# Altium PCB UL-SWAP-DAQ-2.PcbDoc (part 2 of 2)
Units mil, origin at the board's own origin, x right, y up, seen from the top; angles counter-clockwise.
Board outline 3000 x 3000 mil, 4 copper layers (Top Layer, GND, PWR, Bottom Layer), stack 23.756 mil thick; 123 components, 110 nets, 387 pads, 5 vias.
Unrouted connection lines stored in the file: 181.
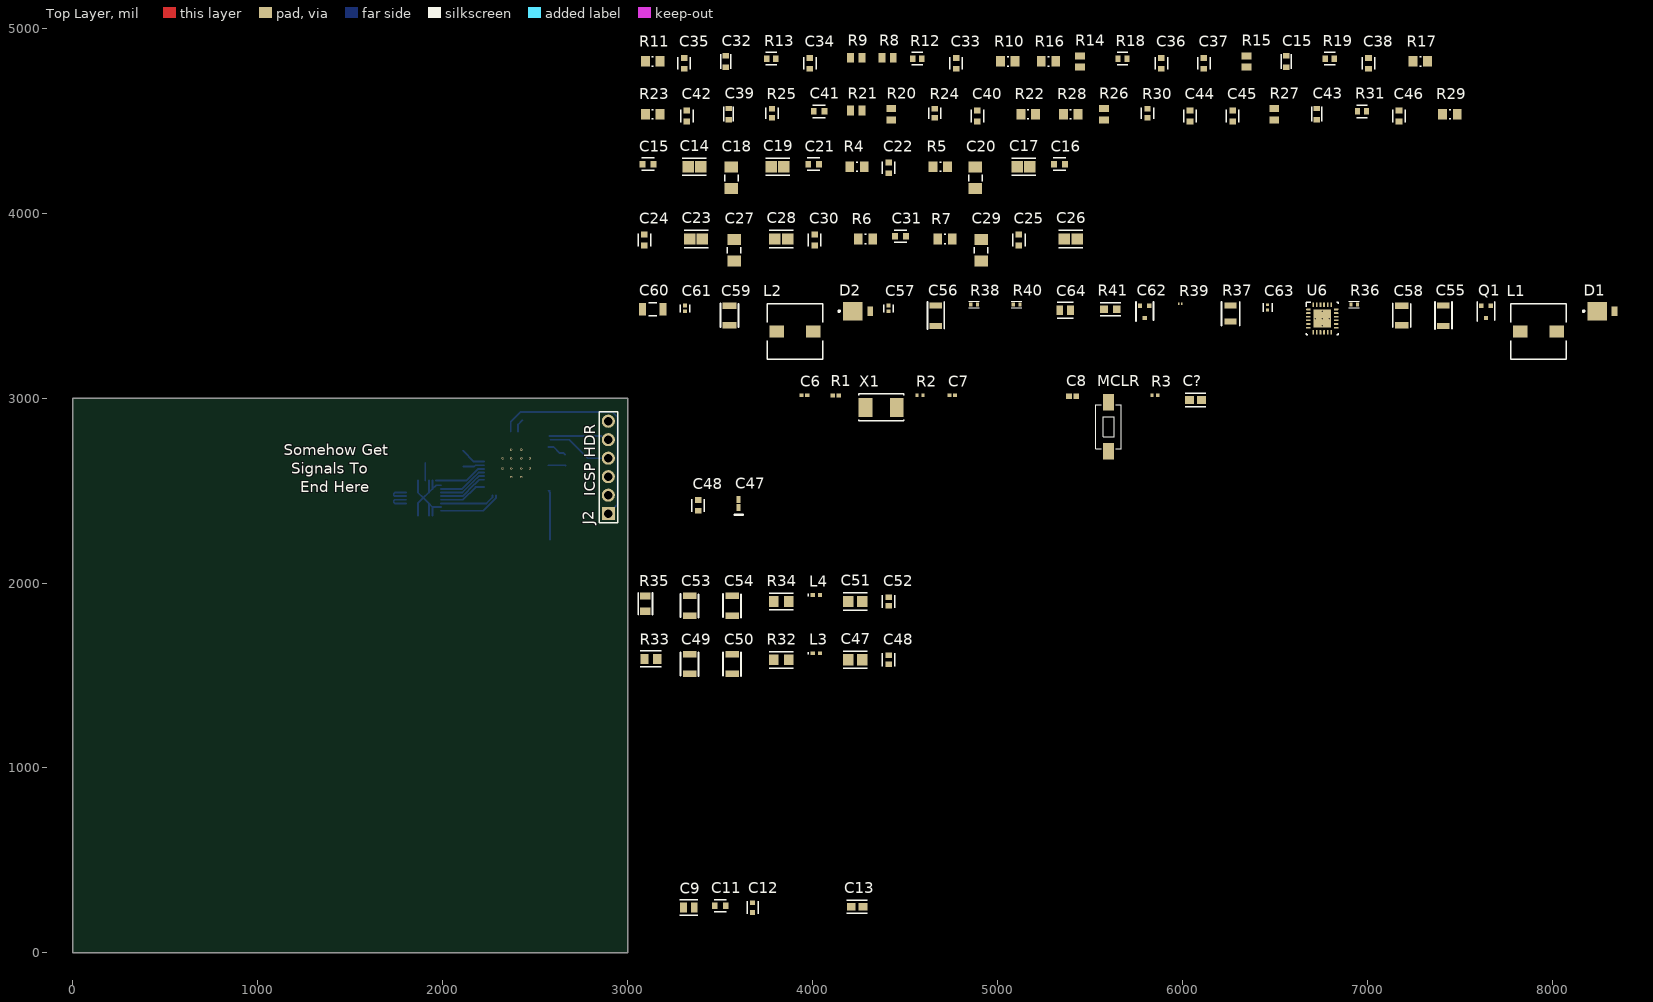
[diagram p0: Top Layer view]

## Via types
v1: diameter 19.68, hole 7.87, Top Layer to Bottom Layer, 5 vias

## Nets (pads, with @x,y where several pads share a name; then routed paths per layer and width w, separated by ;. In a path a pad name is that pad's centre, name@x,y a point inside that pad or via, vN(x,y) a via of type N, cw(c..) or ccw(c..) an arc to the next point about the centre after c; other vN are vias at no path point) (continued)
PGD: (continued)
  Bottom Layer w10: 2582.5,2774.69 2587.61,2774.69 2587.69,2774.76 2683.03,2774.76 2782.79,2675 J2.4
Qnet: L1.1
REFBUF: C9.1 U2.12
REFIN: C10.1 U2.13 | length 95.8
  Bottom Layer w10: U2.13 1904.84,2563.19 1905.47,2563.82 C10.1
SCK: U1.50 U2.21 | length 262.8
  Bottom Layer w10: U2.21 2108.8,2450.16 2177.46,2518.82 U1.50
Sensor_A_N: 
Sensor_A_P: 
Sensor_B_N: 
Sensor_B_P: 
Sensor_C_N: 
Sensor_C_P: 
Sensor_D_N: 
Sensor_D_P: 
SHDN-A: U1.45 U6.7
SHDN-B: U1.59
SHDN-C: U1.63
SHDN-D: U1.6
SW1: C48.1@4410,1561.38 L3.1
SW2: C52.2 L4.1
U1TX: U1.32 U3.2 | length 271.9
  Bottom Layer w10: U1.32 2576.81,2499.13 2577.09,2498.86 2577.09,2492.32 2580,2489.41 U3.2
VDDLBYP: C12.2 U2.28
Vin: C47.1@4192.51,1585 C51.1
VREF: U6.17
pads on no net: C49.7 C49.8 C50.7 C50.8 C53.7 C53.8 C54.7 C54.8 C55.13 C55.14 C56.13 C56.14 C58.7 C58.8 C59.7 C59.8 C62.15 C62.16 C62.17 C?.1 C?.2 J2.6 Q1.15 Q1.16 Q1.17 R35.9 R35.10 R36.7 R36.8 R37.5 R37.6 R38.7 R38.8 R39.9 R39.10 R40.7 R40.8 U1.8 U1.11 U1.12 U1.13 U1.14 U1.15 U1.16 U1.21 U1.23 U1.24 U1.27 U1.28 U1.29 U1.30 U1.31 U1.33 U1.34 U1.36 U1.37 U1.48 U1.49 U1.51 U1.58 U3.3 U3.5 U3.6 U6.12 U6.20 U6.25
copper on no net:
  other v1: 6755,3391.61 6716.61,3430 6755,3430 6793.39,3430 6755,3468.39

## Polygon pours and split planes (outlines as drawn)
GND on GND (split plane): 2979.9,20.1 20.1,20.1 20.1,2979.9 2979.9,2979.9
+3.3V on PWR (split plane): 2979.9,20.1 20.1,20.1 20.1,2979.9 2979.9,2979.9

## Silkscreen, mask and mechanical layers (free items; w line width, h text height)
Top Overlay:
  text "Somehow Get" at 1140,2690 h60
  text "Signals To" at 1180,2589.99 h60
  text "End Here" at 1230,2490 h60

## Text inside footprints (layer, text, board x,y; h text height)
J2: Top Overlay "ICSP HDR" at 2825,2470 h60 r90